# Altium PCB NIXIEClock_151223.PcbDoc
Units mil, origin at the board's own origin, x right, y up, seen from the top; angles counter-clockwise.
Board outline 1912 x 1246 mil, 2 copper layers (Top Layer, Bottom Layer); 14 components, 7 nets, 37 pads, 0 vias.
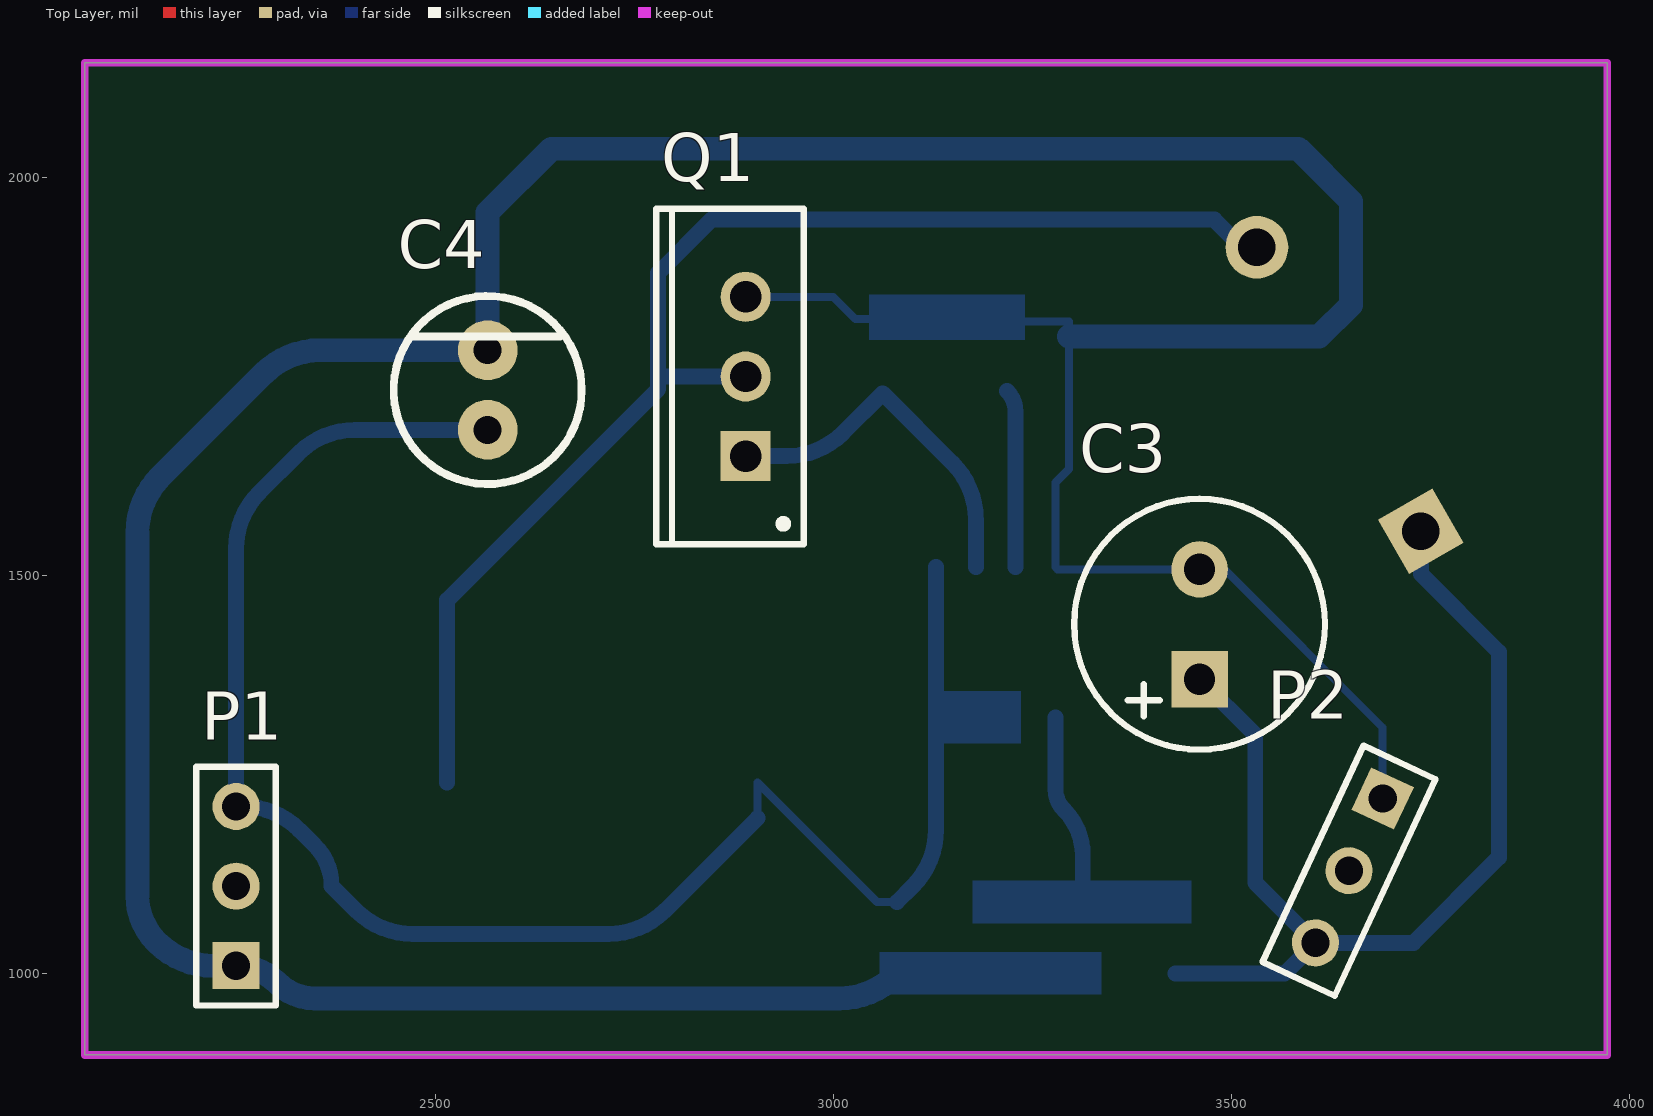
[diagram p0: Top Layer view]
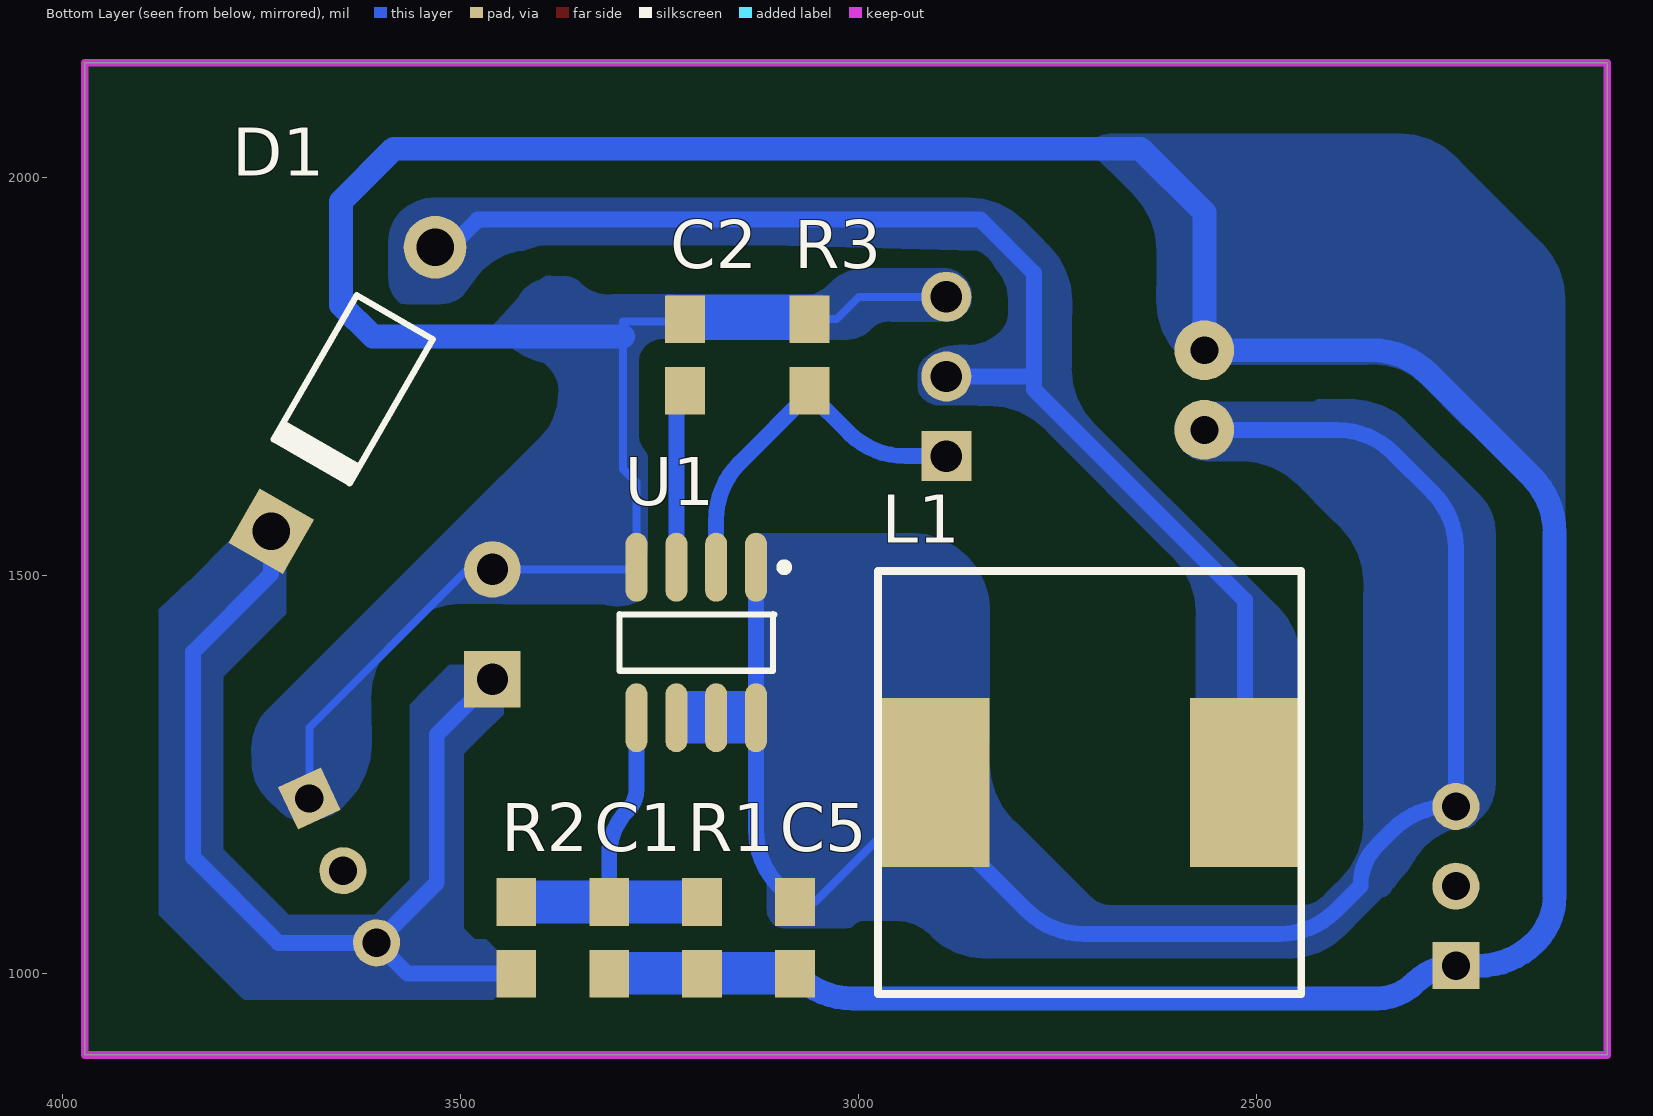
[diagram p1: Bottom Layer view, seen from below]

## Layer stack, top to bottom
Top Solder: solder mask 0.4, Solder Resist, Dk 3.5
Top Layer: signal copper 1.4
Dielectric1: dielectric 12.6, FR-4, Dk 4.8
Bottom Layer: signal copper 1.4
Bottom Solder: solder mask 0.4, Solder Resist, Dk 3.5

## Board outline
2060,898 2060,2144 3972,2144 3972,898

## Design rules (kind name [scope] priority, off if disabled: settings)
Clearance [All] p1: gap=7
ComponentClearance [All] p1: gap=0 collisioncheckmode=3 verticalgap=0 showdistances=FALSE
HoleSize [All] p1: absolutevalues=TRUE maxlimit=500 minlimit=1 maxpercent=80.000 minpercent=20.000
MinimumSolderMaskSliver [All] p1: minsoldermaskwidth=0
PlaneConnect [All] p1: planeconnectstyle=Direct reliefexpansion=20 reliefentries=4 reliefconductorwidth=15 reliefairgap=10
PolygonConnect [All] p1: connectstyle=Direct reliefconductorwidth=15 reliefentries=4 polygonreliefangle="90 Angle" airgapwidth=10
RoutingCorners [All] p1: cornerstyle=Round minsetback=100 maxsetback=100
RoutingVias [All] p1: holewidth=28 width=50 viastyle="Through Hole" minholewidth=10 minwidth=20 maxholewidth=28 maxwidth=50
SilkToSilkClearance [All] p1: silktosilkclearance=0
SilkToSolderMaskClearance [IsPad] p1: minsilkscreentomaskgap=0 clearancetoexposedcopper=TRUE
SolderMaskExpansion [All] p1: expansion=4
Width [All] p1: maxlimit=50 minlimit=1 preferedwidth=10
23 further rules are at their usual default settings.

## Components (designator, comment, footprint, x,y, rotation, side; value= is the part's Value field where it differs from the comment)
C1 "Cap Semi" 0805 3313.33,1090 r270 bottom
C2 "Cap Semi" 0805 3218,1822 r270 bottom
C3 "Cap Pol1" C-RB-8 3460,1370 r90 top
C4 "Cap Pol1" C-RB-6 2566,1733 r90 top
C5 "Cap Semi" 0805 3080,1000 r90 bottom
D1 "UF4007" DO-41 3635.01,1734 r300 bottom
L1 "Inductor Iron" GDRH127 2710,1240 r180 bottom
P1 "Header 3" HDR1X3 2250,1010 r90 top
P2 "Header 3" HDR1X3 3690,1220 r245 top
Q1 "IRF740" TO-220AB 2890,1750 r90 top
R1 "Res Semi" 0805 3196.67,1090 r270 bottom
R2 "Res Semi" 0805 3430,1000 r90 bottom
R3 "Res Semi" 0805 3062,1732 r90 bottom
U1 "MC34063A" SOIC8 3204,1416 r270 bottom

## Footprints (in the part's own frame and the unit in brackets; to place one, negate y for a bottom-side part, rotate by r counter-clockwise, add the part's x,y. Pads: shape width x height; smd on the part's side, far side on the other; paste and mask are expansions set on the pad)
0805 [mil] "1/8W"
  rect 60x50 smd: 1(0,0) 2(90,0)
C-RB-6 [mil]
  round 75 hole 35: 1(-50,0) 2(50,0)
  silkscreen extent -118,-118 118,118, body extent -118,-118 118,118, height 472
C-RB-8 [mm] "35V 220UF电容"
  rect 1.8x1.8 hole 1: 1(0,0)
  round 1.8 hole 1: 2(3.5,0)
  silkscreen extent -2.25,-4 5.75,4
DO-41 [mm] "Diode, Axial; Body 5.2 x 2.7 mm (LxDia. max), Lead Dia. 0.86 mm (max)"
  round 2 hole 1.2: 1(-5.23,0)
  rect 2x2 hole 1.2: 2(5.23,0)
  silkscreen extent -2.65,-1.4 2.75,1.4
GDRH127 [mm]
  rect 3.5x5.4 smd: 1(-4.95,0) 2(4.95,0)
  silkscreen extent -6.75,-6.75 6.75,6.75
HDR1X3 [mm] "Connector; Header; 3 Position"
  rect 1.5x1.5 hole 0.9: 1(0,0)
  round 1.5 hole 0.9: 2(2.54,0) 3(5.08,0)
  silkscreen extent -1.27,-1.27 6.35,1.27
SOIC8 [mm]
  oval 2.2x0.7 smd: 1(-2.4,1.905) 2(-2.4,0.635) 3(-2.4,-0.635) 4(-2.4,-1.905) 5(2.4,-1.905) 6(2.4,-0.635) 7(2.4,0.635) 8(2.4,1.905)
  silkscreen extent -2.52,-2.45 0.9,2.93
TO-220AB [mm] "TO, Thru-Hole, Vertical, Heatsink Mounted; 3 In-Line Leads; Pitch 2.54 mm"
  rect 1.6x1.6 hole 1: 1(-2.54,0)
  round 1.6 hole 1: 2(0,0) 3(2.54,0)
  silkscreen extent -5.35,-1.85 5.35,2.85, body extent -5.4,-1.9 5.4,2.9, height 19.3

## Part data
C1 C2 C5: "Capacitor (Semiconductor SIM Model)"
C3 C4: "Polarized Capacitor (Radial)"
D1: library part "D Schottky", "Schottky Diode"
L1: "Magnetic-Core Inductor"
P1 P2: "Header, 3-Pin"
Q1: library part NMOS-2, "N-Channel Power MOSFET"
R1 R2 R3: "Semiconductor Resistor"

## Nets (pads, with @x,y where several pads share a name; then routed paths per layer and width w, separated by ;. In a path a pad name is that pad's centre, name@x,y a point inside that pad or via, vN(x,y) a via of type N, cw(c..) or ccw(c..) an arc to the next point about the centre after c; other vN are vias at no path point)
12V: C4.1 C5.2 L1.1 P1.3 U1.1 U1.6 U1.7 U1.8 | length 2318.4
  Bottom Layer w10: L1.1@2904.88,1195.44 L1.1 3054.88,1090 C5.2 ; U1.8 U1.7 U1.6
  Bottom Layer w20: C4.1 2399.42,1683 ccw(c2399.42,1583) 2328.71,1653.71 2279.29,1604.29 ccw(c2350,1533.58) 2250,1533.58 P1.3 2258.58,1210 cw(c2258.58,1110) 2329.29,1180.71 2348.79,1161.21 cw(c2297.57,1110) 2370,1110 2400.71,1079.29 ccw(c2471.42,1150) 2417.16,1066 ccw(c2471.42,1150) 2471.42,1050 2718.02,1050 ccw(c2718.02,1150) 2772.28,1066 ccw(c2718.02,1150) 2788.73,1079.29 L1.1@2904.88,1195.44 ; C5.2 3099.71,1109.71 ccw(c3029,1180.42) 3129,1180.42 U1.8 U1.1
GND: C1.2 C2.1 C3.2 C4.2 C5.1 P1.1 P2.1 Q1.3 R1.2 R3.2 U1.4 | length 5397.5
  Bottom Layer w10: Q1.3 3000,1850 3028,1822 R3.2 C2.1 3221,1819 3296,1819 3296,1800 3296,1634 3279,1617 U1.4 3281.69,1507.8 C3.2 3491.21,1507.8 3690,1309.01 P2.1 ; C5.1 R1.2 C1.2
  Bottom Layer w30: C5.1 3078.29,998.29 cw(c3007.58,1069) 3007.58,969 2348.98,969 cw(c2348.98,1036.56) 2301.21,988.79 ccw(c2250,937.57) P1.1 2221.42,1010 cw(c2221.42,1110) 2150.71,1039.29 2150,1040 cw(c2207.94,1097.94) 2126,1097.94 2126,1553.58 cw(c2226,1553.58) 2134.17,1593.17 cw(c2226,1553.58) 2155.29,1624.29 2284.71,1753.71 cw(c2355.42,1683) 2315.83,1774.83 cw(c2355.42,1683) 2355.42,1783 C4.2 2566,1956 2646,2036 3584,2036 3650,1970 3650,1840 3610,1800 3296,1800
NetC1_1: C1.1 R1.1 R2.2 U1.5 | length 474
  Bottom Layer w10: R1.1 C1.1 R2.2
  Bottom Layer w20: U1.5 3279,1231.48 ccw(c3314.7,1231.48) 3289.46,1206.23 cw(c3231.82,1148.59) 3305.98,1182.44 cw(c3231.82,1148.59) 3308.29,1176.82 cw(c3231.82,1148.59) 3313.33,1148.59 C1.1
NetC2_2: C2.2 U1.3 | length 224.5
  Bottom Layer w20: C2.2 cw(c3191.44,1705.44) 3229,1705.44 U1.3
NetD1_1: D1.1 L1.2 Q1.2 | length 1668.7
  Bottom Layer w20: L1.2 2515.12,1469.12 2780,1734 2780,1880 2847,1947 3478.58,1947 D1.1@3537,1888.58 ; 2780,1750 Q1.2
NetQ1_1: Q1.1 R3.1 U1.2 | length 466.1
  Bottom Layer w10: R3.1@3062,1729 R3.1
  Bottom Layer w20: Q1.1 2941.58,1650 ccw(c2941.58,1750) 2996.3,1666.3 ccw(c2941.58,1750) 3012.29,1679.29 3062,1729 3149.71,1641.29 cw(c3079,1570.58) 3179,1570.58 U1.2
VH: C3.1 D1.2 P2.3 R2.1 | length 1325.2
  Bottom Layer w20: R2.1 3566.74,1000 P2.3@3605.32,1038.58 ; C3.1 3530,1300 3530,1114.21 P2.3 P2.3@3605.32,1038.58 ; P2.3@3588.58,1038.58 P2.3@3605.32,1038.58 ; D1.2 3737.97,1502.03 3836,1404 3836,1146 3728.58,1038.58 P2.3@3605.32,1038.58
pads on no net: P1.2 P2.2

## Polygon pours and split planes (outlines as drawn)
VH on Bottom Layer "Top Layer-No Net" (solid, remove dead copper, pour order 8): 3791,1543 3839,1495 3842,1493 3879,1458 3879,1369 3879,1074 3776,971 3772,967 3475,967 3459,967 3453,973 3451,975 3451,1021 3451,1026 3463,1038 3468,1043 3482,1043 3493,1054 3496,1057 3496,1173 3496,1276 3472,1300 3446,1326 3446,1363 3446,1368 3464,1386 3466,1388 3507,1388 3514,1388 3545,1357 3564,1338 3564,1288 3564,1118 3592,1090 3608,1074 3622,1074 3716,1074 3738,1096 3798,1156 3798,1240 3798,1373 3729,1442 3719,1452 3719,1548
NetD1_1 on Bottom Layer "Top Layer-No Net" (solid, remove dead copper, pour order 17): 2445.59,1154.59 2445.59,1391.16 cw(c2545.59,1391.16) 2474.88,1461.88 2517.59,1504.59 2703.3,1690.3 ccw(c2632.59,1761) 2732.59,1761.01 2732.59,1810.59 2732.59,1844.16 cw(c2832.58,1844.16) 2761.88,1914.88 2773.59,1926.59 2792.3,1945.3 cw(c2863,1874.59) 2863.01,1974.59 3080.59,1974.59 3532.13,1974.59 cw(c3532.13,1913.14) 3575.59,1956.59 cw(c3539.39,1920.38) 3590.59,1920.37 3590.59,1876.59 3590.59,1874.97 cw(c3546.21,1874.97) 3577.59,1843.59 cw(c3569.96,1852.74) 3568.88,1840.88 3555.86,1840.88 3526.88,1840.88 cw(c3524.8,1880.73) 3498.09,1851.09 3478.59,1876.59 ccw(c3411.68,1822.31) 3420.59,1908 3399.59,1914.88 3376.88,1914.88 3111.88,1914.88 2851,1908 ccw(c2866.84,1869.75) 2828.59,1885.59 ccw(c2867.19,1846.97) 2812.59,1846.96 2812.59,1827.59 ccw(c2839.14,1827.59) 2820.36,1808.81 2822.59,1806.59 ccw(c2863.63,1847.63) 2863.63,1789.59 2865.59,1789.59 2875.13,1789.59 cw(c2875.14,1728.15) 2918.59,1771.59 cw(c2901.71,1754.7) 2925.59,1754.69 2925.59,1745.59 2925.59,1737.07 cw(c2905.12,1737.06) 2919.59,1722.59 cw(c2897.86,1744.3) 2897.86,1713.59 2891.59,1713.59 2851,1713.59 ccw(c2850.99,1710.19) 2848.59,1712.59 2837.01,1712.59 ccw(c2837,1612.61) 2766.3,1683.3 2617.59,1534.59 2605.88,1522.88 ccw(c2676.57,1452.17) 2576.59,1452.16 2576.59,1346.59
GND on Bottom Layer "Top Layer-No Net" (solid, remove dead copper, pour order 19): 3085,1849 3082.28,1849 cw(c3082.28,1917.28) 3034,1869 ccw(c2992.96,1827.96) 2992.96,1886 2897,1886 2893.14,1886 ccw(c2893.14,1851.86) 2869,1876 2867.9,1874.9 ccw(c2891.8,1851) 2858,1851 2858,1847.9 ccw(c2881.9,1847.9) 2865,1831 2869.22,1826.78 ccw(c2888,1845.56) 2888,1819 2959.89,1819 2960.86,1819 cw(c2960.86,1784.86) 2985,1809 ccw(c3016.38,1840.38) 3016.38,1796 3121,1796
GND on Bottom Layer "Top Layer-No Net" (solid, remove dead copper, pour order 21): 3240.27,1797 3246.54,1797 cw(c3246.55,1766.28) 3268.27,1788 cw(c3248.97,1768.69) 3276.27,1768.69 3276.27,1685 3276.27,1676.31 cw(c3248.97,1676.31) 3268.27,1657 ccw(c3275.51,1649.76) 3265.27,1649.76 3265.27,1536 ccw(c3335.28,1536) 3285.78,1486.49 3276.47,1471.76 3276.27,1468.45 ccw(c3303.91,1519.25) 3321,1464 3446.27,1464 3501.33,1464 cw(c3501.34,1382.07) 3559.27,1440 3582.98,1416.29 cw(c3512.29,1345.58) 3612.27,1345.58 3612.27,1336 3612.27,1287.42 ccw(c3712.27,1287.42) 3641.56,1216.71 3649.27,1209 ccw(c3687.9,1247.63) 3687.9,1193 3703.27,1193 ccw(c3703.27,1224.38) 3725.46,1202.19 3743.27,1220 ccw(c3697.41,1265.87) 3762.27,1265.87 3762.27,1283 ccw(c3692.27,1283) 3741.77,1332.51 3494.27,1580 3402.73,1671.54 cw(c3458.82,1732.65) 3383.62,1697.66 cw(c3469.29,1731.27) 3377.27,1733 cw(c3415.9,1733) 3388.59,1760.31 3395.27,1767 ccw(c3372.25,1868.46) 3460.27,1813 3428.27,1848 ccw(c3388.3,1828.45) 3402.73,1870.54 3393.27,1876 ccw(c3388.44,1864.36) 3383.61,1876 3370,1876 ccw(c3369.99,1845.29) 3348.27,1867 cw(c3314.48,1900.79) 3314.47,1853 3228.27,1853
12V on Bottom Layer "Top Layer-No Net" (solid, remove dead copper, pour order 25): 2565.31,1644.27 2566.58,1644.27 ccw(c2566.58,1675) 2588.31,1653.27 2592,1656.96 ccw(c2564.69,1684.27) 2603.31,1684.27 ccw(c2576.76,1684.27) 2595.53,1703.05 2594.31,1704.27 2588.09,1710.49 ccw(c2569.32,1691.73) 2569.31,1718.27 2431.55,1718.27 cw(c2431.55,1728.51) 2424.31,1721.27 2381.73,1721.27 ccw(c2381.73,1621.28) 2311.02,1691.98 2220.31,1601.27 ccw(c2268.59,1552.99) 2200.31,1552.99 2200.31,1239.27 ccw(c2260.67,1239.27) 2217.99,1196.6 2223.31,1191.27 2227.36,1187.22 ccw(c2239.31,1199.17) 2239.31,1182.27 2248.78,1182.27 cw(c2228.32,1099.52) 2301.31,1143.56 2311.02,1128.56 2321.81,1116.77 cw(c2305.23,1101.73) 2326.31,1109.27 cw(c2318.27,1097.24) 2330.31,1105.27 ccw(c2349,1116.01) 2343.38,1095.2 2366.31,1072.27 2390.02,1048.56 ccw(c2460.73,1119.28) 2460.73,1019.27 2797.31,1019.27 2839.89,1019.27 ccw(c2839.89,1119.27) 2910.6,1048.56 cw(c2953.35,1005.81) 2953.36,1066.27 2994.31,1066.27 cw(c2994.32,1051.8) 3004.55,1062.03 3005.31,1061.27 ccw(c3014.97,1070.93) 3014.97,1057.27 3089.31,1057.27 3095.24,1057.27 ccw(c3095.24,1074.34) 3107.31,1062.27 ccw(c3088,1081.58) 3115.31,1081.59 3115.31,1105.27 3115.31,1119.23 cw(c3173.35,1119.23) 3132.31,1160.27 ccw(c3120.24,1172.34) 3137.31,1172.34 3137.31,1528.27 3137.31,1540.2 ccw(c3120.25,1540.21) 3132.31,1552.27 ccw(c3129.9,1549.88) 3129.9,1553.27 3126.31,1553.27 2934.73,1553.27 ccw(c2934.72,1453.29) 2864.02,1523.98 ccw(c2933.33,1454.67) 2835.31,1454.67 2835.31,1317.27 2835.31,1264.69 cw(c2735.32,1264.69) 2806.02,1193.98 2709.31,1097.27 cw(c2682.76,1123.82) 2682.75,1086.27 2444.31,1086.27 cw(c2444.31,1124.9) 2417,1097.59 2403.31,1111.27 2395.6,1118.98 cw(c2466.31,1189.7) 2366.31,1189.69 2366.31,1469.27 2366.31,1489.85 cw(c2466.31,1489.85) 2395.6,1560.56 2407.31,1572.27 2449.02,1613.98 cw(c2519.73,1543.28) 2519.73,1643.27 2568.31,1643.27
GND on Bottom Layer "Top Layer-No Net" (solid, remove dead copper, pour order 27): 2113,1564 2113,1782 2166,1782 2172.36,1784.64 2183.73,1796 2193,1796 2202,1805 2199.36,1811.36 2149.36,1861.36 2143,1864 2114.53,1864 cw(c2213,1846.58) 2142.29,1917.29 2238,2013 2250.71,2025.71 cw(c2321.42,1955) 2321.42,2055 2682,2055 cw(c2682,2011.54) 2712.73,2042.27 2716,2039 2655.29,1978.29 ccw(c2726,1907.58) 2626,1907.58 2626,1845.42 cw(c2526,1845.42) 2596.71,1774.71 2580,1758 2563.1,1765 2353.36,1765 ccw(c2353.36,1679.64) 2293,1740 2242.68,1689.68 cw(c2200,1732.36) 2200,1672

## Keep-outs
Keep-Out Layer:
  the board outline again, w10

## Other copper
Bottom Layer:
  region net GND: 3058,1027 3058,974 3337,974 3337,1027
  region net NetC1_1: 3175,1117 3175,1063 3450,1063 3450,1117
  region net GND: 3045,1853 3045,1796 3241,1796 3241,1853
  region net 12V: 3122,1355 3122,1289 3236,1289 3236,1355